# Altium PCB SourceOptode.PcbDoc
Units mm, origin at the board's own origin, x right, y up, seen from the top; angles counter-clockwise.
Board outline 16 x 16 mm, 2 copper layers (Top Layer, Bottom Layer); 12 components, 9 nets, 36 pads, 12 vias.
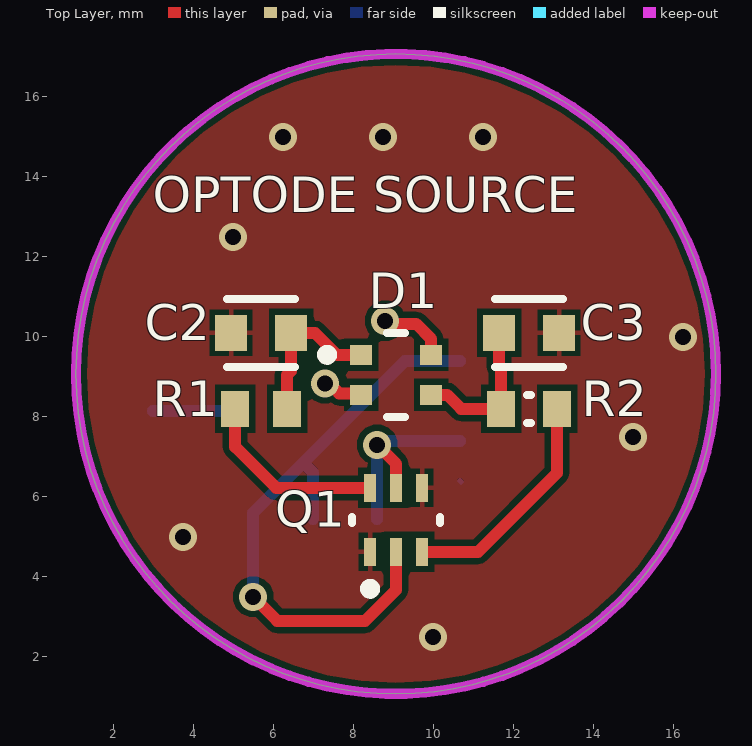
[diagram p0: Top Layer view]
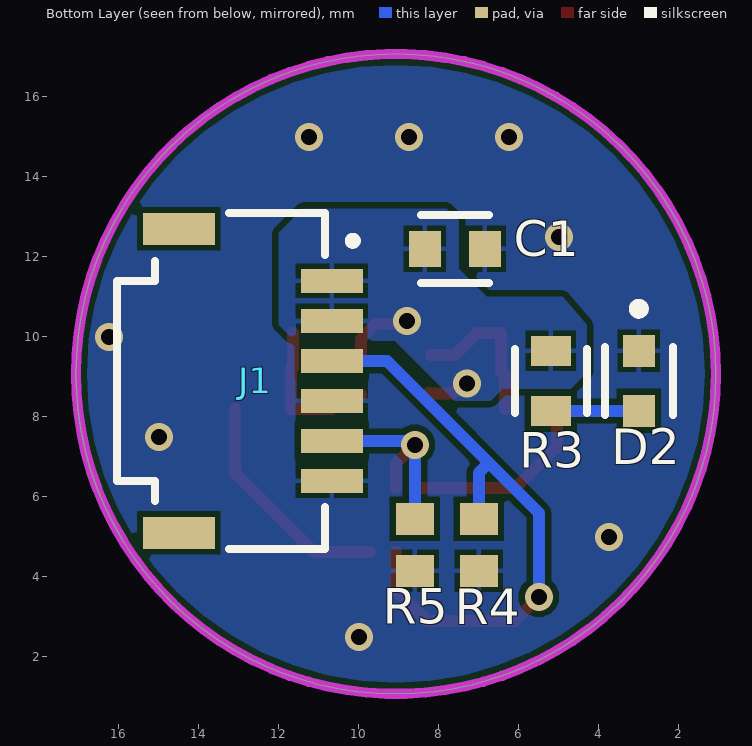
[diagram p1: Bottom Layer view, seen from below]
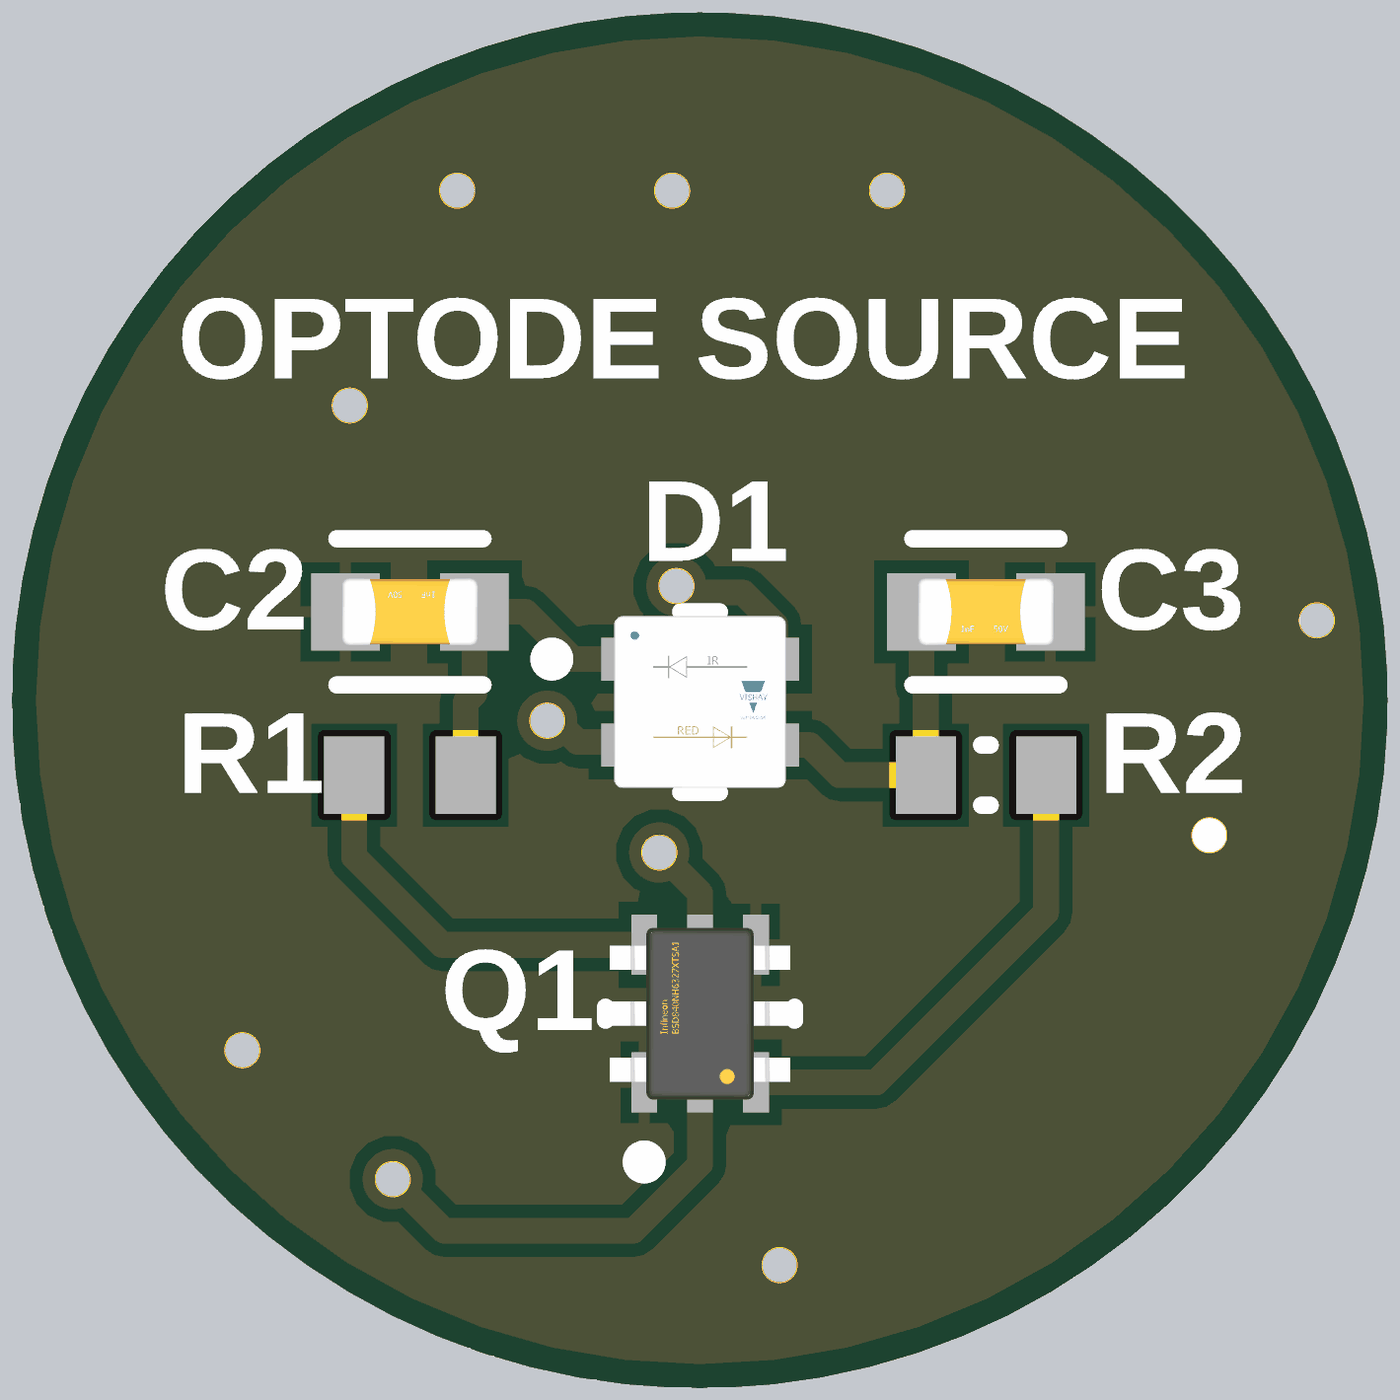
[diagram p2: 3D render of the assembled board from above, using the file's embedded part models]
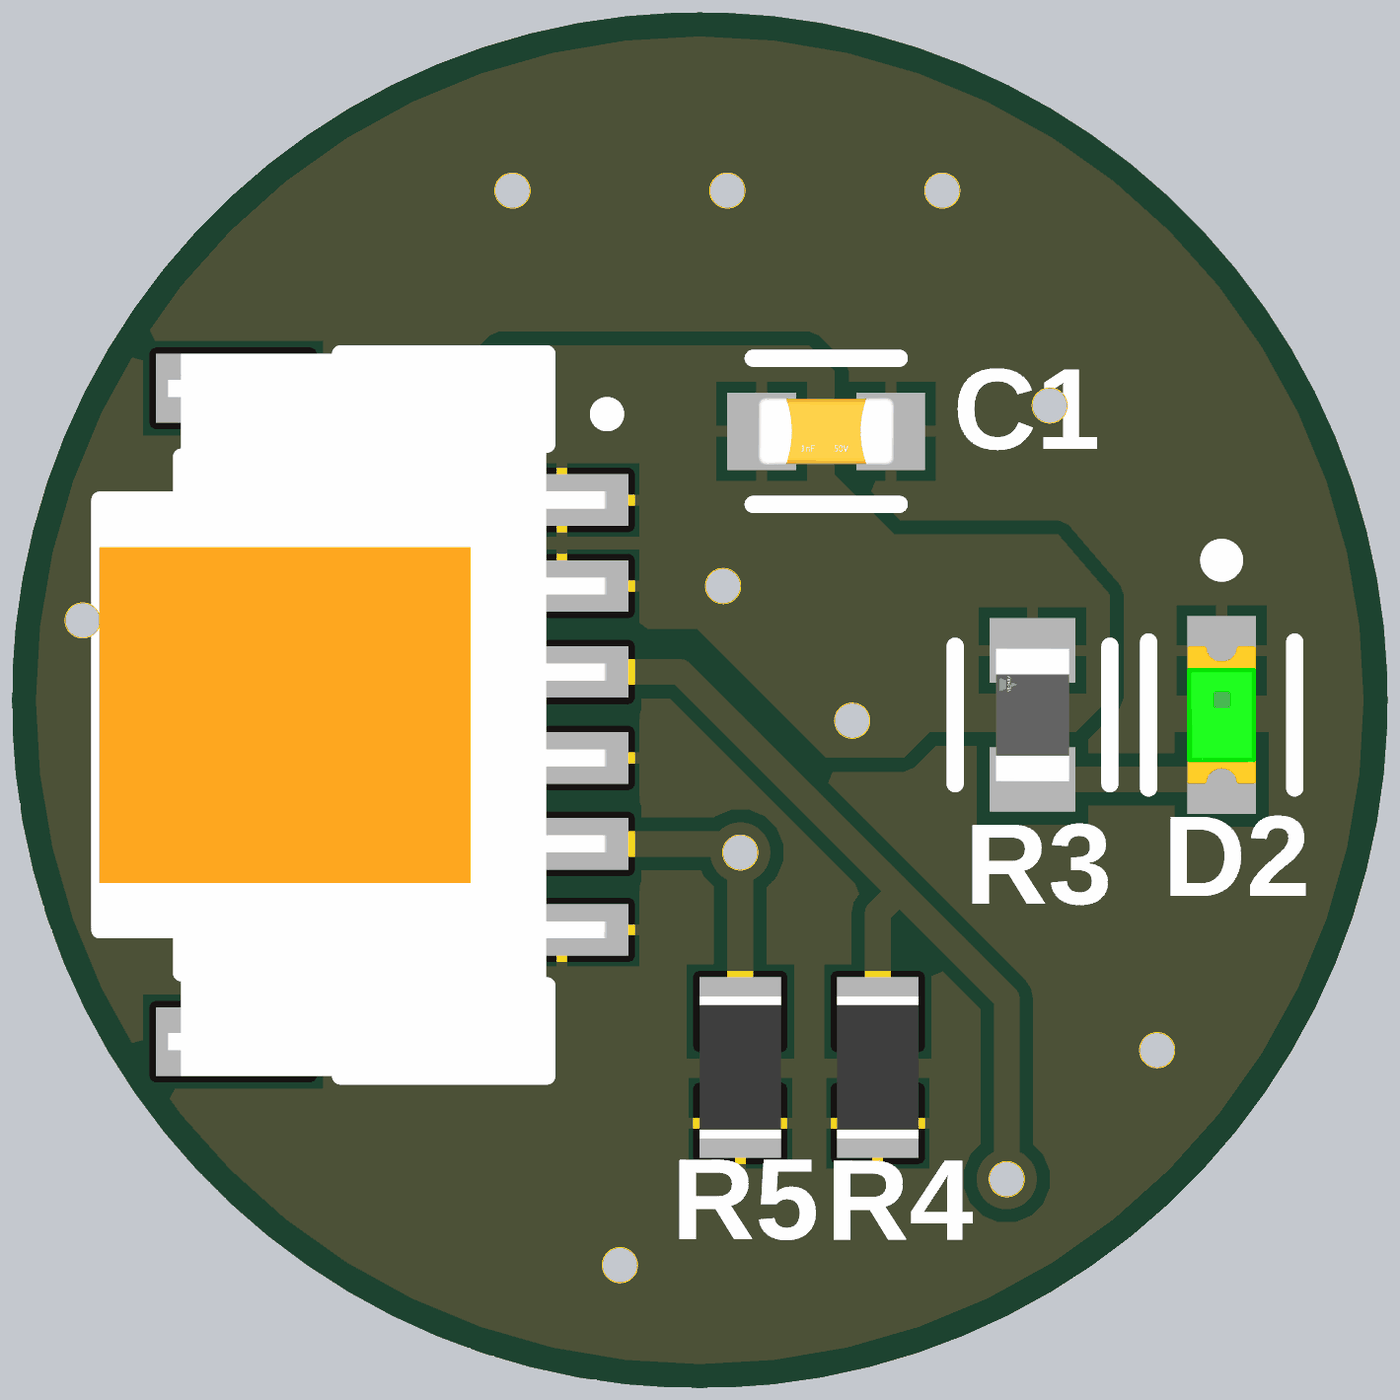
[diagram p3: 3D render of the assembled board from below, using the file's embedded part models]

## Layer stack, top to bottom
Top Solder: solder mask 0.0102, Solder Resist, Dk 3.5
Top Layer: signal copper 0.0356
Dielectric 1: dielectric 0.32, FR-4, Dk 4.8
Bottom Layer: signal copper 0.0356
Bottom Solder: solder mask 0.0102, Solder Resist, Dk 3.5

## Board outline
9.071,1.071 cw(c9.071,9.071) 1.071,9.071 cw(c9.071,9.071) 9.071,17.071 cw(c9.071,9.071) 17.071,9.071 cw(c9.071,9.071)

## Design rules (kind name [scope] priority, off if disabled: settings)
BoardOutlineClearance [All] p1: gap=0.2 ignorepadtopadclearanceinfootprint=FALSE
Clearance [All] p1: gap=0.15 ignorepadtopadclearanceinfootprint=FALSE except(0.127: Arc-Text Track-Text SMDPad-Text THPad-Text Via-Text Fill-Text Poly-Text Region-Text Text-Text; 0.25: Arc-Hole Track-Hole SMDPad-Hole THPad-Hole Via-Hole Fill-Hole Poly-Hole Region-Hole Text-Hole; 0.275: Arc-Via Track-Via SMDPad-Via THPad-Via Via-Via; 0.33: Arc-THPad Track-THPad)
ComponentClearance [All] p1: gap=0.127 collisioncheckmode=3 verticalgap=0.127 showdistances=TRUE
DiffPairsRouting [All] p1: maxlimit=0.254 minlimit=0.127 mostfreqgap=0.127 toplayer_minwidth=0.127 toplayer_maxwidth=25.4 toplayer_prefwidth=0.127 bottomlayer_minwidth=0.127 bottomlayer_maxwidth=25.4 bottomlayer_prefwidth=0.127 maxuncoupledlength=12.7
Height [All] p1: minheight=0 maxheight=1816.048 prefheight=12.7
HoleSize [All] p1: absolutevalues=TRUE maxlimit=6.3 minlimit=0.3 maxpercent=80.000 minpercent=20.000
HoleToHoleClearance [All] p1: gap=0.3 allowstackedmicrovias=FALSE
MinimumAnnularRing [All] p1: minimumring=0.076
MinimumSolderMaskSliver [All] p1: minsoldermaskwidth=0
PlaneClearance [All] p1: clearance=0.127
PlaneConnect PlaneConnectPowerPads [InPadClass('PowerPads')] p1: planeconnectstyle=Direct reliefexpansion=0.508 reliefentries=4 reliefconductorwidth=0.254 reliefairgap=0.254
PlaneConnect [All] p2: pad.planeconnectstyle=Relief pad.reliefexpansion=0.3 pad.reliefentries=4 pad.reliefconductorwidth=0.127 pad.reliefairgap=0.127 via.planeconnectstyle=Direct via.reliefexpansion=0.3 via.reliefentries=4 via.reliefconductorwidth=0.127 via.reliefairgap=0.127
PolygonConnect PolygonConnectPowerPads [All vs (InPadClass('PowerPads'))] p1: connectstyle=Direct reliefconductorwidth=0.254 reliefentries=4 polygonreliefangle="90 Angle" airgapwidth=0.254
PolygonConnect [All] p2: thpad.connectstyle=Relief thpad.reliefconductorwidth=0.127 thpad.reliefentries=4 thpad.polygonreliefangle="90 Angle" thpad.airgapwidth=0.127 smdpad.connectstyle=Relief smdpad.reliefconductorwidth=0.127 smdpad.reliefentries=4 smdpad.polygonreliefangle="90 Angle" smdpad.airgapwidth=0.127 via.connectstyle=Direct via.reliefconductorwidth=0.127 via.reliefentries=4 via.polygonreliefangle="90 Angle" via.airgapwidth=0.127
RoutingVias [All] p1: holewidth=0.3 width=0.6 viastyle="Through Hole" minholewidth=0.3 minwidth=0.6 maxholewidth=0.6 maxwidth=6.6
SilkToSilkClearance [All] p1: silktosilkclearance=0
SilkToSolderMaskClearance [IsPad] p1: minsilkscreentomaskgap=0.127 clearancetoexposedcopper=TRUE
SolderMaskExpansion [All] p1: expansion=0.075 istentingtop=FALSE
SupplyNets "Schematic Supply Nets_1" [InNet('GND')] p1: voltage=0.000
SupplyNets "Schematic Supply Nets" [InNet('3V3')] p2: voltage=0.000
Width [All] p1: maxlimit=25.4 minlimit=0.127 preferedwidth=0.127 minimp=50.000000 maximp=50.000000 favimp=50.000000
20 further rules are at their usual default settings.

## Components (designator, comment, footprint, x,y, rotation, side; value= is the part's Value field where it differs from the comment)
C1 "CC0603KRX7R7BB104" FP-CC0603-DA-MFG 7.6,12.2 r180 bottom value="100 nF"
C2 "CC0603KRX7R7BB104" FP-CC0603-DA-MFG 5.7,10.1 r180 top value="100 nF"
C3 "CC0603KRX7R7BB104" FP-CC0603-DA-MFG 12.4,10.1 r0 top value="100 nF"
D1 "VSMD66694" FP-6_550-5347_01-4-MFG 9.075,9.05 r0 top
D2 "LTST-C190GKT" FP-LTST-C190GKT-MFG 3,8.9 r270 bottom
J1 "T1M-06-X-SH-L" SAMTEC_T1M-06-X-SH-L 10.85,8.9 r270 bottom
Q1 "BSD840NH6327XTSA1" FP-PG-SOT363-6-MFG 9.075,5.425 r90 top
R1 "RK73H1JTTD38R3F" RESC1608X55X30LL20T10 5.7,8.2 r0 top
R2 "26R1 1% 0603(1608)" RESC0603(1608)_L 12.4,8.2 r180 top value="26.10 Ohm"
R3 "CRCW0603200RFKEA" FP-CRCW0603-e3-MFG 5.2,8.9 r90 bottom
R4 "CRCW060310K0FKEA" RESC1609X50X30NL8T20 7,4.8 r90 bottom
R5 "CRCW060310K0FKEA" RESC1609X50X30NL8T20 8.6,4.8 r90 bottom

## Footprints (in the part's own frame and the unit in brackets; to place one, negate y for a bottom-side part, rotate by r counter-clockwise, add the part's x,y. Pads: shape width x height; smd on the part's side, far side on the other; paste and mask are expansions set on the pad)
FP-6_550-5347_01-4-MFG [mm]
  rect 0.55x0.5 smd paste+0 mask+0: 1(-0.875,0.5) 2(-0.875,-0.5) 3(0.875,-0.5) 4(0.875,0.5)
  silkscreen extent -1.85,-1.05 0.22,1.05, body extent -1.25,-1.15 1.25,1.15, height 0.25
FP-CC0603-DA-MFG [mm]
  rect 0.8x0.9 smd paste+0 mask+0: 1(-0.75,0) 2(0.75,0)
  silkscreen extent -0.85,-0.85 0.85,0.85, body extent -0.8,-0.4 0.8,0.4, height 0.9
FP-CRCW0603-e3-MFG [mm]
  rect 0.75x1 smd paste+0 mask+0: 1(-0.75,0) 2(0.75,0)
  silkscreen extent -0.8,-0.9 0.8,0.9, body extent -0.77,-0.43 0.77,0.43, height 0.5
FP-LTST-C190GKT-MFG [mm]
  rect 0.8x0.8 smd paste+0 mask+0: 1(-0.75,0) 2(0.75,0)
  silkscreen extent -1.92,-0.85 0.85,0.85, body extent -0.8,-0.4 0.8,0.4, height 0.9
FP-PG-SOT363-6-MFG [mm]
  rect 0.7x0.3 smd paste+0 mask+0: 1(-0.8,0.65) 2(-0.8,0) 3(-0.8,-0.65) 4(0.8,-0.65) 5(0.8,0) 6(0.8,0.65)
  silkscreen extent -1.85,-1.1 0.08,1.1, body extent -1.25,-1.2 1.25,1.2, height 0.25
RESC0603(1608)_L [mm] "Chip Resistor, Body 1.6x0.8mm, IPC High Density"
  rect 0.7x0.9 smd: 1(-0.7,0) 2(0.7,0)
  silkscreen extent -0.05,-0.35 0.05,0.35, body extent -0.85,-0.47 0.85,0.47, height 0.6
RESC1608X55X30LL20T10 [mm] "Chip Resistor, 2-Leads, Body 1.60x0.80mm, IPC High Density"
  rect 0.7x0.9 smd: 1(-0.65,0) 2(0.65,0)
  body extent -0.9,-0.5 0.9,0.5, height 0.55
RESC1609X50X30NL8T20 [mm] "Chip Resistor, 2-Leads, Body 1.65x0.95mm, IPC Medium Density"
  rect 0.8x0.95 smd: 1(-0.65,0) 2(0.65,0)
  body extent -0.82,-0.48 0.82,0.48, height 0.5
SAMTEC_T1M-06-X-SH-L [mm]
  rect 0.6x1.55 smd: 01(-2.5,0.175) 02(-1.5,0.175) 03(-0.5,0.175) 04(0.5,0.175) 05(1.5,0.175) 06(2.5,0.175)
  rect 0.8x1.8 smd: S1(-3.8,-3.65) S2(3.8,-3.65)
  silkscreen extent -4.2,-5.2 4.2,0.8, body extent -4.2,-5.21 4.2,0.69, height 4.72

## Part data
C1 C2 C3: library part CMP-2000-05002-2, "CAP CER 0.1UF 16V X7R 0603", Capacitance="100 nF", Manufacturer=YAGEO, Package=CC0603-DA, Temperature="-55°C to +125°C", Temperature Characteristic=X7R, Temperature Coefficient=15%, Temperature Range High=+125°C, Temperature Range Low=-55°C, Tolerance=0.1, Voltage="16 V", Automotive=No, Category=Cap, ComponentLink2Description=Datasheet, ComponentLink2URL=http://www.yageo.com/documents/recent/UPY-GPHC_X7R_6.3V-to-50V_18.pdf, Device Class L1="Passive Components", Device Class L2=Capacitors, Device Class L3="Ceramic Capacitors", Digikey Description="CAP CER 0.1UF 16V X7R 0603", Footprint Url=http://www.yageo.com/exep/pages/download/literatures/UPY-C_GEN_24.pdf, Height=0.9mm, Lead Free=Yes, Manufacturer Part Number=CC0603KRX7R7BB104, Material=Ceramic, Mouser Description="Multilayer Ceramic Capacitor, CC Series, 0.1 - F, - 10%, X7R, 16 V, 0603 [1608 Metric]", Octopart=https://octopart.com/cc0603krx7r7bb104-yageo-192941, RoHS=TRUE, Voltage Rating="16 V"
D1: library part CMP-02520-000014-1, "EMITTER DUAL 660/940NM SQURE PCB", Ambient Temperature Range High=+85°C, Ambient Temperature Range Low=-25°C, Colour=Red,IR, Forward Current=20mA, Forward Voltage=2/1.4V, Manufacturer="Vishay Semiconductor Opto Division", Max Junction Temp=+100°C, Package=6.550-5347.01-4, Power Dissipation=161/119mW, Reverse Voltage=5V, Temperature="-25°C to +85°C", Automotive=No, Category=Diode, ComponentLink2Description=Datasheet, ComponentLink2URL=https://www.vishay.com/docs/84324/vsmd66694.pdf, Device Class L1=Optoelectronics, Device Class L2=LEDs, Device Class L3=unset, Digikey Description="EMITTER DUAL 660/940NM SQURE PCB", Height=0.97mm, Lead Free=Yes, Led Orientation="Top View", Manufacturer Part Number=VSMD66694, Octopart=https://octopart.com/vsmd66694-vishay-74221794, Peak Emmision Wavelength=660/940nm, RoHS=TRUE, Temperature Range High=+85°C, Temperature Range Low=-25°C, Viewing Angle=120°
D2: library part CMP-22017-000005-2, "LED GREEN CLEAR CHIP SMD", Case Code (Imperial)=0603, Case Code (Metric)=1608, Color=Green, Forward Current=30mA, Forward Voltage=2.1V, Lens Color=Colorless, Max Operating Temperature=85°C, Min Operating Temperature=-55°C, Package Quantity=1, Power Dissipation=100mW, Reverse Voltage=5V, Test Current=10mA, Voltage=2V, Case/Package=0603, Depth=0.8mm, Dominant Wavelength=569nm, Height=0.8mm, Illumination Color=Green, Lead Free="Lead Free", Length=1.6mm, Lens Style=Clear, Lens Transparency=Clear, Luminous Intensity=6mcd, Mount="Surface Mount", Number of Elements=1, Number of LEDs=1, Number of Pins=2, Packaging="Tape and Reel", Power Rating=100mW, Radiation Hardening=No, Viewing Angle=130°, Wavelength=565nm, Width=0.8mm
J1: "Connector Header Surface Mount, Right Angle 6 position 0.039\" (1.00mm)", Package=None, Availability=Unavailable, MF=Samtec, MP=T1M-06-X-SH-L, Price=None
Q1: library part CMP-32901-000170-1, "MOSFET 2N-CH 20V 0.88A SOT363", Case/Package=SOT-363-6, Continuous Drain Current (ID)=880mA, Drain to Source Voltage (Vdss)=20V, Gate to Source Voltage (Vgs)=8V, Input Capacitance=78pF, Max Operating Temperature=150°C, Max Power Dissipation=500mW, Min Operating Temperature=-55°C, FET Type="2 N-Channel", Halogen Free="Halogen Free", Lead Free="Lead Free", Max Dual Supply Voltage=20V, Mount="Surface Mount", Number of Pins=6, Packaging="Tape and Reel", Rds On Max=400mR, Rise Time=2.2ns
R1: library part CMP-2000-01468-1, Manufacturer="KOA Speer", Resistance="38.3 Ohm", Part Number=RK73H1JTTD38R3F
R2: library part CMP-1012-00329-1, "26R1 0.1W 1% 0603 (1608 Metric)  SMD", Case-EIA=0603, Case-Metric=1608, Power="0.1 W", Tolerance="1 %", Technology=SMT
R3: library part CMP-2000-03062-2, "RES Thick Film, 200Ω, 1%, 0.1W, 100ppm/°C, 0603", Case Code (Imperial)=0603, Case Code (Metric)=1608, Max Operating Temperature=155°C, Min Operating Temperature=-55°C, Package Quantity=5000, Power Rating=100mW, Resistance=200R, Temperature Coefficient=100ppm/°C, Tolerance=1%, Voltage Rating=75V, Case/Package=0603, Composition="Thick Film", Contact Plating=Tin, Depth=0.85mm, Height=0.45mm, Lead Free="Lead Free", Length=1.55mm, Military Standard=Not, Number of Pins=2, Packaging="Tape and Reel", Termination=SMD/SMT, Voltage Rating (DC)=75V, Weight=7.1E-05oz, Width=0.85mm
R4 R5: library part CMP-1666-00005-4, "Chip Resistor, 10 KOhm, +/- 1%, 100 mW, -55 to 155 degC, 0603 (1608 Metric), RoHS, Tape and Reel", Manufacturer="Vishay Semiconductor", Max Operating Temperature="155 degC", Min Operating Temperature="-55 degC", Package Quantity=5000, Resistance=10kR, Voltage Rating="75 V", ComponentLink1Description="Manufacturer URL", ComponentLink1URL=http://www.vishay.com/, ComponentLink2Description=Datasheet, ComponentLink2URL=https://datasheet.ciiva.com/11809/0900766b80d98afc-11809037.pdf, DatasheetVersion=06/2012, Height="0.45 mm", Length="1.55 mm", Mounting Technology="Surface Mount", PackageDescription="2-Pin Surface Mount Device, Body 1.575 x 0.85 mm", PackageReference=0603, Packaging="Tape and Reel", REACH SVHC=Unknown, RoHSCompliant=true

## Via types
v1: diameter 0.7, hole 0.4, Top Layer to Bottom Layer, tented both sides, 12 vias

## Nets (pads, with @x,y where several pads share a name; then routed paths per layer and width w, separated by ;. In a path a pad name is that pad's centre, name@x,y a point inside that pad or via, vN(x,y) a via of type N, cw(c..) or ccw(c..) an arc to the next point about the centre after c; other vN are vias at no path point)
3V3: C1.1 D1.2 D1.4 J1.01 J1.02 R3.2 | length 2.8
  Top Layer w0.3: v1(7.298,8.833) 7.406,8.833 7.654,8.585 8.165,8.585 D1.2 D1.2@8.241,8.591 ; v1(8.8,10.4) 8.877,10.323 9.575,10.323 9.949,9.95 D1.4 D1.4
660_NM_LED_GATE: J1.05 Q1.5 R5.2 | length 5.2
  Top Layer w0.3: v1(8.6,7.3) 9.075,6.825 Q1.5
  Bottom Layer w0.3: R5.2 v1(8.6,7.3) 8.7,7.4 J1.05
940NM_LED_GATE: J1.03 Q1.2 R4.2 | length 15.4
  Top Layer w0.3: v1(5.5,3.5) 6.1,2.9 8.3,2.9 9.075,3.675 Q1.2
  Bottom Layer w0.3: v1(5.5,3.5) 5.5,5.6 6.75,6.85 ; R4.2 7,6.6 6.75,6.85 ; J1.03 9.3,9.4 6.75,6.85
GND: C1.2 C2.2 C3.2 D2.1 J1.04 J1.06 Q1.1 Q1.4 R4.1 R5.1 | length 0
  Bottom Layer w0.127: J1.06 J1.06@10.7,6.375
  other v1: 10,2.5 3.75,5 15,7.5 16.25,10 5,12.5 6.25,15 8.75,15 11.25,15
NetC2_1: C2.1 D1.1 R1.2 | length 3.9
  Top Layer w0.3: R1.2 6.35,9.05 6.45,9.15 C2.1 ; C2.1@6.5,10.1 7.042,10.1 7.592,9.55 D1.1
NetC3_1: C3.1 D1.3 R2.2 | length 3.8
  Top Layer w0.3: D1.3 10.35,8.55 10.7,8.2 R2.2 11.7,9.2 11.65,9.25 C3.1
NetD2_2: D2.2 R3.1 | length 2.2
  Bottom Layer w0.3: D2.2 R3.1
NetQ1_3: Q1.3 R2.1 | length 5.8
  Top Layer w0.3: Q1.3 11.125,4.625 13.1,6.6 R2.1
NetQ1_6: Q1.6 R1.1 | length 4.7
  Top Layer w0.3: R1.1 5.05,7.25 6.075,6.225 Q1.6
pads on no net: J1.S1 J1.S2

## Polygon pours and split planes (outlines as drawn)
GND on Top Layer "GND_L01_P000" (solid, pour order 0): 9.071,1.071 cw(c9.071,9.071) 1.071,9.071 cw(c9.071,9.071) 9.071,17.071 cw(c9.071,9.071) 17.071,9.071 cw(c9.071,9.071)
3V3 on Bottom Layer "3V3_L02_P002" (solid, pour order 2): 4.3,10.3 4.3,9.1 4.7,8.7 6.4,8.7 6.7,8.4 7.6,8.4 9.1,9.9 11.6,9.9 12,10.3 12,12.6 11.4,13.2 7.8,13.2 7.5,12.9 7.5,11.7 6.8,11 4.9,11
GND on Bottom Layer "GND_L02_P001" (solid, pour order 1): 9.071,1.071 cw(c9.071,9.071) 1.071,9.071 cw(c9.071,9.071) 9.071,17.071 cw(c9.071,9.071) 17.071,9.071 cw(c9.071,9.071)

## Keep-outs
Keep-Out Layer:
  circle w0.254: c9.071,9.071 r8

## Silkscreen, mask and mechanical layers (free items; w line width, h text height)
Top Overlay:
  text "OPTODE SOURCE" at 2.995,12.817 h1.52